# EAGLE board E-Piano-SM (EAGLE 9.4.0)
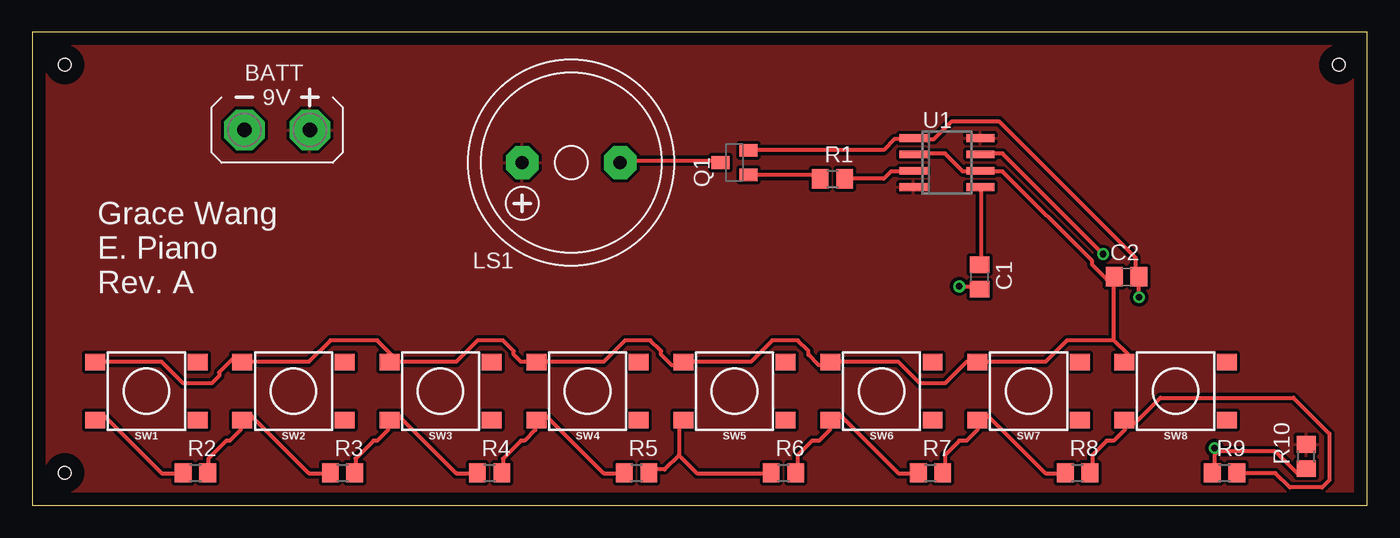
[diagram p0: board, top side]
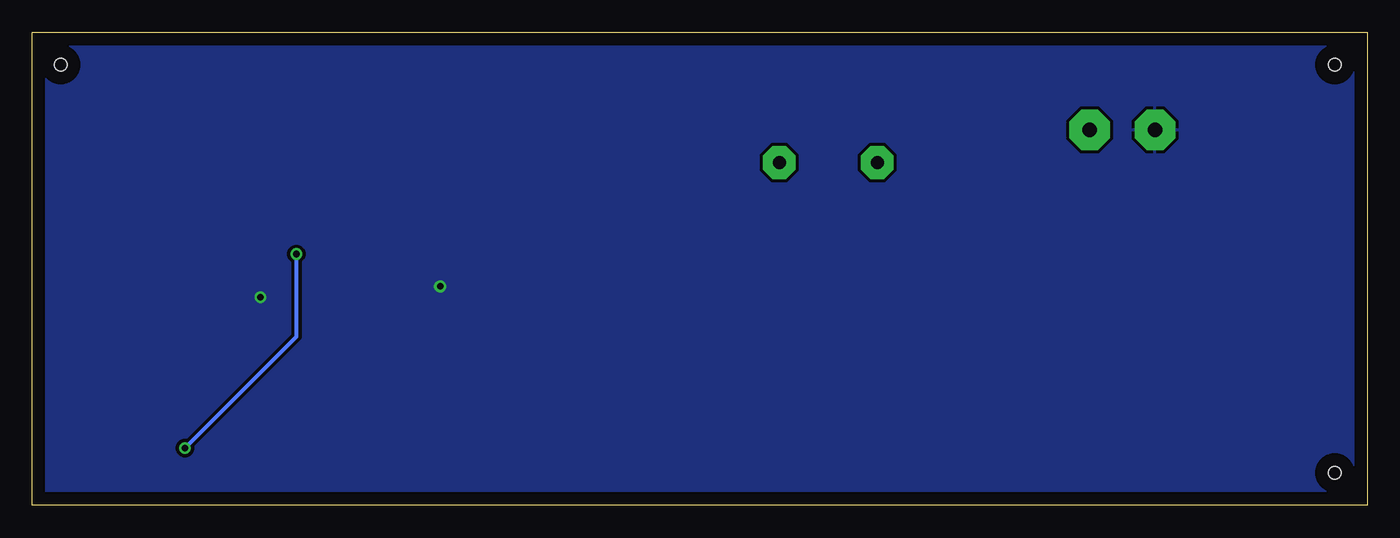
[diagram p1: board, bottom side, seen from below]

Size 103.81 x 36.82 mm. Coordinates in mm from the lower left corner, seen from the top.
Outline: 0,0 103.81,0 103.81,36.82 0,36.82 0,0
Copper layers (1*16): Top 0.035mm / dielectric 1.5mm / Bottom 0.035mm
Design rules "default": minimum track width 6mil, minimum drill 0.35mm, track to track 6mil, track to pad 6mil, pad to pad 6mil, via to via 6mil, smd to smd 6mil, copper to edge 40mil, drill to drill 6mil, minimum pad ring 10mil, minimum via ring 8mil, stop-mask expansion 4mil, vias tented up to drill 0mil, thermal gap 10mil
Net classes: 0 default: width 0.305 mm, drill 0.508 mm, clearance 0.254 mm
Holes 1 mm at 2.54,34.29 2.54,2.54 101.6,34.29

## Footprints (pad centres in the part's own frame; a part is rotated, then mirrored left to right if it is on the bottom)
AB9V = drill 1.118 pad 3.15 octagon: + 0,2.54; - 0,-2.54
C0805 = smd 1.3 x 1.5: 1 -0.95,0; 2 0.95,0
F/HMB = drill 1.016 pad 2.54 octagon: + 3.81,0; - -3.81,0
SOT23-BEC = smd 1 x 1.4: B -0.95,-1.1; C 0,1.1; E 0.95,-1.1
R0805 = smd 1.3 x 1.5: 1 -0.95,0; 2 0.95,0
TACTILE_SWITCH_SMD_6.2MM_TALL = smd 1.55 x 1.3: A1 -3.975,-2.25; A2 3.975,-2.25; B1 -3.975,2.25; B2 3.975,2.25
SO08 = smd 0.6 x 2.2: 1 -1.905,-2.6; 2 -0.635,-2.6; 3 0.635,-2.6; 4 1.905,-2.6; 5 1.905,2.6; 6 0.635,2.6; 7 -0.635,2.6; 8 -1.905,2.6

## Placement (x,y rotation side)
BATT  AB9V  [AB9V]  19.05,29.21 270 top
C1  0.1uF  [C0805]  73.66,17.78 270 top
C2  0.1uF  [C0805]  85.09,17.78 0 top
LS1  [F/HMB]  41.91,26.67 180 top
Q1  BCW66  [SOT23-BEC]  54.61,26.67 90 top
R1  1K  [R0805]  62.23,25.4 0 top
R2  1.5K  [R0805]  12.7,2.54 0 top
R3  1.3K  [R0805]  24.13,2.54 0 top
R4  620  [R0805]  35.56,2.54 0 top
R5  1.1K  [R0805]  46.99,2.54 0 top
R6  1K  [R0805]  58.42,2.54 0 top
R7  910  [R0805]  69.85,2.54 0 top
R8  390  [R0805]  81.28,2.54 0 top
R9  6.2K  [R0805]  92.71,2.54 0 top
R10  1K  [R0805]  99.06,3.81 90 top
SW1  MOMENTARY-SWITCH-SPST-SMD-6.2MM-TALL  [TACTILE_SWITCH_SMD_6.2MM_TALL]  8.89,8.89 180 top
SW2  MOMENTARY-SWITCH-SPST-SMD-6.2MM-TALL  [TACTILE_SWITCH_SMD_6.2MM_TALL]  20.32,8.89 180 top
SW3  MOMENTARY-SWITCH-SPST-SMD-6.2MM-TALL  [TACTILE_SWITCH_SMD_6.2MM_TALL]  31.75,8.89 180 top
SW4  MOMENTARY-SWITCH-SPST-SMD-6.2MM-TALL  [TACTILE_SWITCH_SMD_6.2MM_TALL]  43.18,8.89 180 top
SW5  MOMENTARY-SWITCH-SPST-SMD-6.2MM-TALL  [TACTILE_SWITCH_SMD_6.2MM_TALL]  54.61,8.89 180 top
SW6  MOMENTARY-SWITCH-SPST-SMD-6.2MM-TALL  [TACTILE_SWITCH_SMD_6.2MM_TALL]  66.04,8.89 180 top
SW7  MOMENTARY-SWITCH-SPST-SMD-6.2MM-TALL  [TACTILE_SWITCH_SMD_6.2MM_TALL]  77.47,8.89 180 top
SW8  MOMENTARY-SWITCH-SPST-SMD-6.2MM-TALL  [TACTILE_SWITCH_SMD_6.2MM_TALL]  88.9,8.89 180 top
U1  NE555D  [SO08]  71.12,26.67 270 top

## Library data of the parts
BATT = battery
C1 C2 = rcl; MOUSER#: 791-MT21B104K500CT; MPN: MT21B104K500CT; OC_NEWARK: unknown; SPICEPREFIX: C
LS1 = buzzer; MOUSER#: 665-AST-01508MR-R; OC_FARNELL: unknown; OC_NEWARK: unknown
Q1 = transistor; MF: INFINION TECHNOLOGIES; MOUSER#: 726-BCW66KHE6327HTSA; MPN: BCW66KHE6327HTSA1; OC_NEWARK: 58K2048
R1 R6 R10 = rcl; MOUSER#: 652-CR0805FX-1001ELF; MPN: CR0805FX-1001ELF; OC_NEWARK: unknown; SPICEPREFIX: R
R2 = rcl; MOUSER#: 652-CR0805FX-1501ELF; MPN: CR0805FX-1501ELF; OC_NEWARK: unknown; SPICEPREFIX: R
R3 = rcl; MOUSER#: 652-CR0805JW-132ELF; MPN: CR0805JW-132ELF; OC_NEWARK: unknown; SPICEPREFIX: R
R4 = rcl; MOUSER#: 652-CR0805JW-621ELF; MPN: CR0805JW-621ELF; OC_NEWARK: unknown; SPICEPREFIX: R
R5 = rcl; MOUSER#: 652-CR0805FX-1101ELF; MPN: CR0805FX-1101ELF; OC_NEWARK: unknown; SPICEPREFIX: R
R7 = rcl; MOUSER#: 652-CR0805FX-9100ELF; MPN: CR0805FX-9100ELF; OC_NEWARK: unknown; SPICEPREFIX: R
R8 = rcl; MOUSER#: 652-CR0805JW-391ELF; MPN: CR0805JW-391ELF; OC_NEWARK: unknown; SPICEPREFIX: R
R9 = rcl; MOUSER#: 652-CR0805FX-6201ELF; MPN: CR0805FX-6201ELF; OC_NEWARK: unknown; SPICEPREFIX: R
SW1-SW8 = SparkFun-Switches; MOUSER#: 653-B3F-1000; OC_NEWARK: unknown; PROD_ID: SWCH-11966; SF_SKU: COM-12992
U1 = linear; MOUSER#: 595-TLC555CDR; MPN: TLC555CDR; OC_NEWARK: 24M8296

## Nets
0: BATT.- C1.2 C2.2 Q1.E U1.1
N$1: R8.2 R9.2 SW8.B2
N$2: R9.1 R10.1 U1.7
N$3: R2.1 SW1.B2
N$4: R7.2 R8.1 SW7.B2
N$5: R6.2 R7.1 SW6.B2
N$6: R5.2 R6.1 SW5.B2
N$7: R4.2 R5.1 SW4.B2
N$8: R3.2 R4.1 SW3.B2
N$9: R2.2 R3.1 SW2.B2
N$11: R1.2 U1.3
N$12: C1.1 U1.5
N$13: LS1.- Q1.C
N$14: Q1.B R1.1
TR: C2.1 SW1.A2 SW2.A2 SW3.A2 SW4.A2 SW5.A2 SW6.A2 SW7.A2 SW8.A2 U1.2 U1.6
VCC: BATT.+ LS1.+ R10.2 U1.4 U1.8

## Tracks (layer width: path | path; a pad name or v marks a point on that pad's centre or on a via)
0  (via drill 0.51)
  Top 0.305: v72.08,17.04 73.48,17.04 C1.2 | v86.06,16.2 86.06,17.6 C2.2 85.78,17.88 85.78,19.28 75.16,29.9 71.53,29.9 70.13,28.5 68.73,28.5 U1.1 68.45,28.5 67.06,28.5 66.22,27.66 55.88,27.66 Q1.E
  pour Bottom: -1.27,38.1 -1.27,-1.27 105.41,-1.27 105.41,38.1
N$1
  Top 0.305: 84.94,6.43 84.94,5.87 84.1,5.03 83.54,5.03 82.42,3.91 82.42,2.79 R8.2 | 84.94,6.43 85.78,6.43 87.73,8.38 98.07,8.38 100.86,5.59 100.86,1.96 100.31,1.4 97.79,1.4 96.67,2.52 93.88,2.52 R9.2 | 84.94,6.43 SW8.B2
N$2  (via drill 0.51)
  Top 0.305: 92.2,4.19 91.92,3.91 91.92,2.79 R9.1 | 92.2,4.19 96.67,4.19 98.35,2.52 98.63,2.52 98.91,2.79 R10.1 | v83.26,19.56 75.44,27.38 73.76,27.38 U1.7 | 92.2,4.19 v91.92,4.47
  Bottom 0.305: v83.26,19.56 83.26,13.13 v91.92,4.47
N$3
  Top 0.305: R2.1 11.73,2.52 10.06,2.52 5.59,6.99 5.31,6.99 5.03,6.71 SW1.B2
N$4
  Top 0.305: R7.2 70.97,2.79 70.97,3.91 72.08,5.03 72.64,5.03 73.48,5.87 73.48,6.43 SW7.B2 73.76,6.71 74.04,6.99 74.32,6.99 78.79,2.52 80.19,2.52 R8.1
N$5
  Top 0.305: R6.2 59.51,2.79 59.51,3.91 60.63,5.03 61.19,5.03 62.03,5.87 62.03,6.43 SW6.B2 62.31,6.71 62.59,6.99 62.87,6.99 67.33,2.52 68.73,2.52 R7.1
N$6
  Top 0.305: 50.29,3.91 49.17,2.79 48.06,2.79 R5.2 | 50.29,3.91 50.29,6.15 50.57,6.43 SW5.B2 | 50.29,3.91 51.69,2.52 57.28,2.52 R6.1
N$7
  Top 0.305: R4.2 36.6,2.79 36.6,3.63 38,5.03 38.28,5.03 39.12,5.87 39.12,6.43 SW4.B2 39.4,6.71 39.67,6.99 39.95,6.99 44.42,2.52 45.82,2.52 R5.1
N$8
  Top 0.305: R3.2 25.15,2.79 25.15,3.63 26.54,5.03 26.82,5.03 27.66,5.87 27.66,6.43 SW3.B2 27.94,6.71 28.22,6.99 28.5,6.99 32.97,2.52 34.37,2.52 R4.1
N$9
  Top 0.305: R2.2 13.69,2.79 13.69,3.63 15.09,5.03 15.37,5.03 16.2,5.87 16.2,6.43 SW2.B2 16.48,6.71 16.76,6.99 17.04,6.99 21.51,2.52 22.91,2.52 R3.1
N$11
  Top 0.305: R1.2 63.42,25.43 66.22,25.43 66.78,25.98 68.45,25.98 U1.3
N$12
  Top 0.305: C1.1 73.76,19 73.76,24.59 U1.5
N$13
  Top 0.305: Q1.C 53.37,26.82 45.82,26.82 LS1.-
N$14
  Top 0.305: Q1.B 55.88,25.7 60.91,25.7 61.19,25.43 R1.1
TR
  Top 0.305: SW1.A2 5.03,11.18 10.06,11.18 11.73,9.5 13.97,9.5 14.53,10.06 14.53,10.34 15.65,11.46 15.93,11.46 16.2,11.18 SW2.A2 16.48,11.18 21.51,11.18 23.19,12.85 26.82,12.85 28.5,11.18 | 28.5,11.18 32.97,11.18 34.65,12.85 36.6,12.85 37.44,12.01 37.44,11.73 38,11.18 39.12,11.18 SW4.A2 39.4,11.18 44.42,11.18 46.1,12.85 48.06,12.85 48.9,12.01 48.9,11.73 49.73,10.9 50.57,10.9 SW5.A2 50.85,11.18 55.88,11.18 57.56,12.85 59.51,12.85 60.35,12.01 60.35,11.73 61.19,10.9 62.03,10.9 SW6.A2 62.31,11.18 67.33,11.18 69.01,9.5 70.97,9.5 72.64,11.18 73.48,11.18 SW7.A2 73.76,11.18 78.79,11.18 80.47,12.85 84.1,12.85 | 28.5,11.18 27.94,11.18 SW3.A2 28.5,11.18 | U1.2 68.73,27.38 70.97,27.38 72.36,25.98 73.48,25.98 U1.6 73.76,25.98 75.44,25.98 82.42,19 82.42,18.72 84.1,17.04 | 84.1,12.85 84.1,17.04 | 84.1,17.04 84.1,17.6 C2.1 84.1,17.04 | 84.1,12.85 85.22,11.73 85.22,11.46 84.94,11.18 SW8.A2
VCC
  pour Top: -1.27,38.1 -1.27,-1.27 105.41,-1.27 105.41,38.1

## Text on the board
tNames: Grace Wang / E. Piano / Rev. A